# Altium PCB N-GLCD.PcbDoc
Units mm, origin at the board's own origin, x right, y up, seen from the top; angles counter-clockwise.
Board outline 33.02 x 15.24 mm, 2 copper layers (Top Layer, Bottom Layer), stack 1.571 mm thick; 10 components, 17 nets, 70 pads, 14 vias.
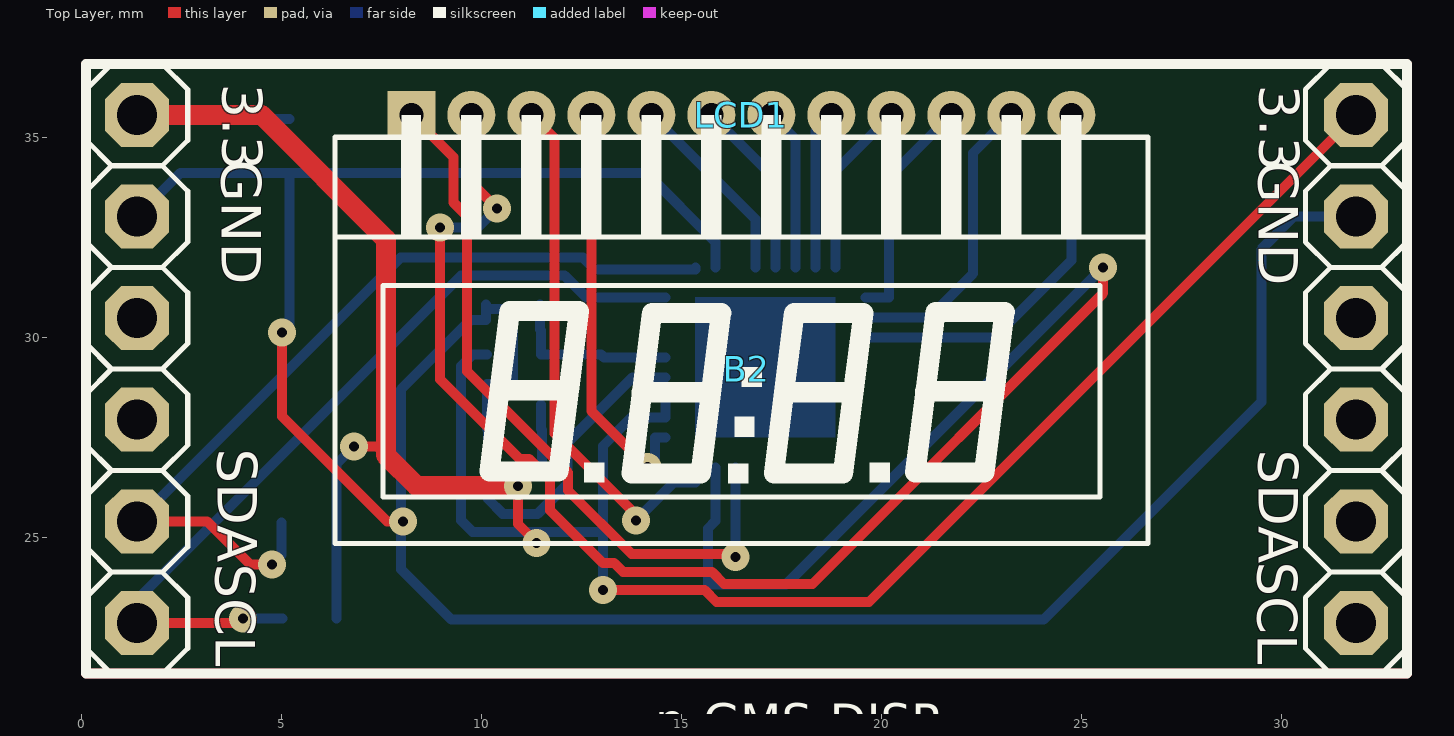
[diagram p0: Top Layer view]
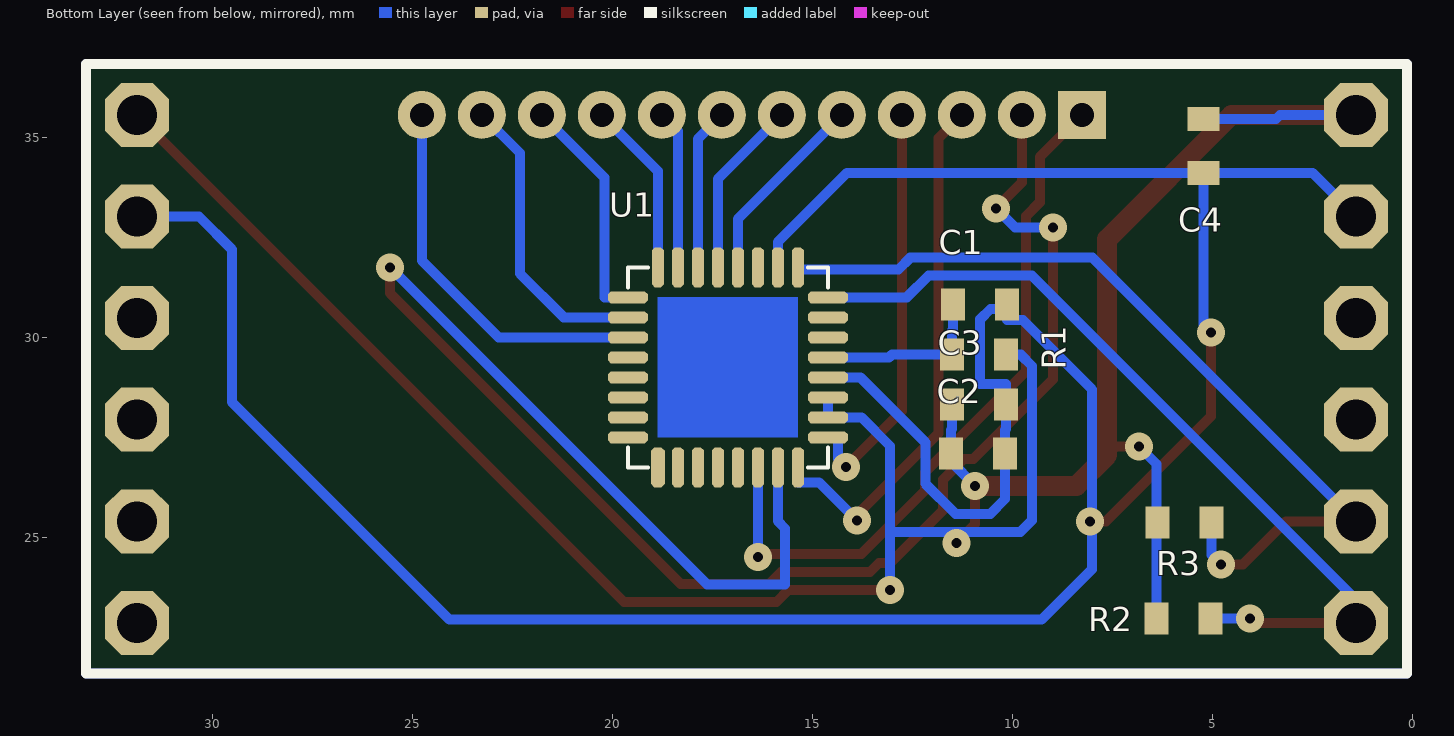
[diagram p1: Bottom Layer view, seen from below]

## Layer stack, top to bottom
Top Solder: solder mask 0.0102, Solder Resist, Dk 3.5
Top Layer: signal copper 0.0356
Dielectric 1: dielectric 1.5, FR-4, Dk 4.8
Bottom Layer: signal copper 0.0356
Bottom Solder: solder mask 0.0102, Solder Resist, Dk 3.5

## Board outline
0.127,21.59 33.147,21.59 33.147,36.83 0.127,36.83

## Design rules (kind name [scope] priority, off if disabled: settings)
Clearance [All] p1: gap=0.2 ignorepadtopadclearanceinfootprint=FALSE except(0: Arc-Hole Track-Hole SMDPad-Hole THPad-Hole Via-Hole Fill-Hole Poly-Hole Region-Hole Text-Hole)
PolygonConnect [All] p1: connectstyle=Relief reliefconductorwidth=0.254 reliefentries=4 polygonreliefangle="90 Angle" airgapwidth=0.254
RoomDefinition N-GLCD [InComponentClass('N-GLCD')] p1: confinementstyle=ConfineIn formatcopy=TRUE lockcomponents=FALSE outline 34.417,44.196 -2.159,44.196 -2.159,-1.397 34.417,-1.397
RoutingVias [All] p1: holewidth=0.25 width=0.7 viastyle="Through Hole" minholewidth=0.25 minwidth=0.7 maxholewidth=0.25 maxwidth=0.7
SolderMaskExpansion [All] p1: expansion=0.102 istentingtop=FALSE
Width [All] p1: maxlimit=1.27 minlimit=0.25 preferedwidth=0.25
30 further rules are at their usual default settings.

## Components (designator, comment, footprint, x,y, rotation, side; value= is the part's Value field where it differs from the comment)
B2 "N-GMS-DISP" N-GMS-DISP 1.397,35.56 r270 top locked
C1 "100nF" 0603_cap 10.81,30.815 r180 bottom
C2 "100nF" 0603_cap 10.835,27.09 r0 bottom
C3 "100nF" 0603_cap 10.835,28.315 r180 bottom
C4 "100nF" 0603_cap 5.207,34.798 r270 bottom
LCD1 "S401M16KR" LCD-S401M16KR 8.255,35.56 r0 top locked
R1 "10K" 0603_res 10.81,29.565 r0 bottom
R2 "10K" 0603_res 5.725,22.975 r180 bottom
R3 "10K" 0603_res 5.7,25.375 r180 bottom
U1 "PCA8561AHN" QFN32-HVQFN32_0.5mm_LONG 14.605,31.75 r0 bottom

## Footprints (in the part's own frame and the unit in brackets; to place one, negate y for a bottom-side part, rotate by r counter-clockwise, add the part's x,y. Pads: shape width x height; smd on the part's side, far side on the other; paste and mask are expansions set on the pad)
0603_cap [mm]
  rect 0.6x0.8 smd: 1(-0.66,0) 2(0.686,0)
  body extent -0.8,-0.4 0.8,0.4, height 0.3
0603_res [mm]
  rect 0.6x0.8 smd: 1(-0.66,0) 2(0.686,0)
  body extent -0.8,-0.4 0.8,0.4, height 0.3
LCD-S401M16KR [mm]
  rect 1.2x1.2 hole 0.6: 1(0,0)
  round 1.2 hole 0.6: 2(1.5,0) 3(3,0) 4(4.5,0) 5(6,0) 6(7.5,0) 7(9,0) 8(10.5,0) 9(12,0) 10(13.5,0) 11(15,0) 12(16.5,0)
  silkscreen extent -1.91,-10.72 18.41,0
N-GMS-DISP [mil]
  oct 63x63 hole 39.37: 1(0,0) 2(100,0) 3(200,0) 4(300,0) 5(400,0) 6(500,0) 7(500,1200) 8(400,1200) 9(300,1200) 10(200,1200) 11(100,1200) 12(0,1200)
  silkscreen extent -50,-50 550,1250, body extent -48,-48 552,1250, height 331
QFN32-HVQFN32_0.5mm_LONG [mm]
  oct 1x0.3 smd: 1(0,4.25) 2(0,3.75) 3(0,3.25) 4(0,2.75) 5(0,2.25) 6(0,1.75) 7(0,1.25) 8(0,0.75) 17(5,0.75) 18(5,1.25) 19(5,1.75) 20(5,2.25) 21(5,2.75) 22(5,3.25) 23(5,3.75) 24(5,4.25)
  oct 0.3x1 smd: 9(0.75,0) 10(1.25,0) 11(1.75,0) 12(2.25,0) 13(2.75,0) 14(3.25,0) 15(3.75,0) 16(4.25,0) 26(3.75,5) 27(3.25,5) 28(2.75,5) 29(2.25,5) 30(1.75,5) 31(1.25,5) 32(0.75,5)
  oct 0.35x1 smd: 25(4.25,5)
  Top Layer region: 0.75,4.25 4.25,4.25 4.25,0.75 0.75,0.75
  silkscreen extent 0,0 5,5, body extent 0,0 5,5, height 0.97

## Part data
C1 C2 C3 C4: library part C, "CAPACITOR"
LCD1: library part LCD-S401M16KR
R1 R2 R3: library part R, "RESISTOR"

## Via types
v1: diameter 0.7, hole 0.25, Top Layer to Bottom Layer, tented both sides, 13 vias
v2: diameter 0.7, hole 0.25, Top Layer to Bottom Layer, 1 vias

## Nets (pads, with @x,y where several pads share a name; then routed paths per layer and width w, separated by ;. In a path a pad name is that pad's centre, name@x,y a point inside that pad or via, vN(x,y) a via of type N, cw(c..) or ccw(c..) an arc to the next point about the centre after c; other vN are vias at no path point)
3.3V: B2.1 B2.12 C2.2 C3.1 C4.1 R1.1 R2.1 R3.1 U1.2 U1.3 | length 68.3
  Top Layer w0.25: v2(6.825,27.275) 7.4,27.275 7.62,27.055 ; v1(10.922,26.289) 10.922,25.331 v1(11.39,24.863) ; v1(13.048,23.681) 15.592,23.681 15.889,23.383 19.7,23.383 B2.12
  Top Layer w0.5: B2.1 4.515,35.56 7.62,32.455 7.62,27.055 8.386,26.289 v1(10.922,26.289)
  Bottom Layer w0.25: B2.1 3.302,35.56 3.404,35.458 C4.1 ; R2.1 6.385,26.835 v2(6.825,27.275) ; R1.1 9.779,29.566 9.5,29.286 9.5,25.425 9.786,25.139 11.115,25.139 ; v1(10.922,26.289) 11.521,26.888 C2.2 11.521,27.686 11.495,27.711 C3.1 ; v1(11.39,24.863) 11.115,25.139 ; v1(13.048,23.681) 13.048,25.139 ; U1.3 U1.2 13.764,28 13.048,27.283 13.048,25.139 ; 11.115,25.139 13.048,25.139
COM0: LCD1.1 U1.30 | length 18.1
  Top Layer w0.25: LCD1.1 9.305,34.51 9.305,33.374 9.65,33.03 9.65,29.152 12.175,26.627 12.175,26.172 13.767,24.581 16.283,24.581 v1(16.355,24.508)
  Bottom Layer w0.25: v1(16.355,24.508) U1.30
COM1: LCD1.2 U1.31 | length 47
  Top Layer w0.25: v1(8.975,32.75) 8.975,28.95 10.961,26.964 11.202,26.964 11.725,26.441 11.725,25.675 13.044,24.356 13.327,24.356 13.552,24.131 15.778,24.131 16.075,23.833 18.283,23.833 25.552,31.102 v1(25.552,31.75) ; LCD1.2 9.755,33.87 v1(10.4,33.225)
  Bottom Layer w0.25: v1(8.975,32.75) 9.925,32.75 v1(10.4,33.225) ; U1.31 15.855,25.405 15.672,25.222 15.672,23.825 17.628,23.825 v1(25.552,31.75)
COM2: LCD1.3 U1.32 | length 13.5
  Top Layer w0.25: LCD1.3 11.836,34.979 11.836,27.602 13.876,25.563 v1(13.876,25.426)
  Bottom Layer w0.25: v1(13.876,25.426) 14.824,26.375 15.355,26.375 U1.32
COM3: LCD1.4 U1.1 | length 10.5
  Top Layer w0.25: LCD1.4 12.755,28.158 v1(14.155,26.758)
  Bottom Layer w0.25: v1(14.155,26.758) 14.351,26.954 14.351,27.5 U1.1
GND: B2.2 B2.11 C1.2 C2.1 C3.2 C4.2 U1.4 U1.10 | length 77.7
  Top Layer w0.25: v1(5.025,30.125) 5.025,28.025 7.65,25.4 v1(8.05,25.4)
  Bottom Layer w0.25: B2.2 2.489,34.112 C4.2 ; v1(5.025,30.125) 5.207,30.307 C4.2 ; v1(8.05,25.4) v1@8,25.4 ; C1.2 C1.2@10.124,30.709 ; U1.4 13.792,29 12.167,27.374 12.167,26.34 11.416,25.589 10.541,25.589 10.175,25.955 C2.1 10.175,27.686 10.149,27.711 C3.2 10.149,28.829 10.795,28.829 10.795,30.455 10.541,30.709 C1.2@10.124,30.709 ; U1.10 15.855,32.385 14.128,34.112 C4.2 ; B2.11 30.325,33.02 29.505,32.2 29.505,28.38 24.065,22.94 9.26,22.94 8,24.2 v1@8,25.4 ; v1@8,25.4 8,28.701 9.728,30.429 10.124,30.429 C1.2@10.124,30.709
RESET: C1.1 R1.2 U1.5 | length 4.4
  Bottom Layer w0.25: C1.1 11.47,30.201 11.496,30.175 R1.2 13.005,29.565 13.07,29.5 U1.5
S0: LCD1.5 U1.12 | length 4.9
  Bottom Layer w0.25: LCD1.5 16.855,32.96 U1.12
S1: LCD1.6 U1.13 | length 4.5
  Bottom Layer w0.25: LCD1.6 17.355,33.96 U1.13
S2: LCD1.7 U1.14 | length 4.1
  Bottom Layer w0.25: LCD1.7 17.855,34.96 U1.14
S3: LCD1.8 U1.15 | length 4
  Bottom Layer w0.25: U1.15 18.355,35.16 LCD1.8
S4: LCD1.9 U1.16 | length 4.4
  Bottom Layer w0.25: U1.16 18.855,34.16 LCD1.9
S5: LCD1.10 U1.17 | length 5.8
  Bottom Layer w0.25: U1.17 20.193,31 20.193,33.998 LCD1.10
S6: LCD1.11 U1.18 | length 7.5
  Bottom Layer w0.25: U1.18 21.209,30.5 22.301,31.592 22.301,34.606 LCD1.11
S7: LCD1.12 U1.19 | length 9.6
  Bottom Layer w0.25: U1.19 22.837,30 24.755,31.918 LCD1.12
SCL: B2.6 R2.2 U1.8 | length 21.1
  Top Layer w0.25: B2.6 3.935,22.86 v1(4.05,22.975)
  Bottom Layer w0.25: B2.6 1.397,23.437 9.5,31.54 12.09,31.54 12.631,31 U1.8 ; v1(4.05,22.975) R2.2
SDA: B2.5 R3.2 U1.9 | length 21.8
  Top Layer w0.25: B2.5 3.15,25.4 4.225,24.325 v1(4.775,24.325)
  Bottom Layer w0.25: B2.5 7.987,31.99 12.545,31.99 12.836,31.699 15.355,31.699 U1.9 ; v1(4.775,24.325) 5.014,24.564 R3.2
pads on no net: B2.3 B2.4 B2.7 B2.8 B2.9 B2.10 U1.6 U1.7 U1.11 U1.20 U1.21 U1.22 U1.23 U1.24 U1.25 U1.26 U1.27 U1.28 U1.29
copper on no net: | length 193
  Top Layer w0.25: 0.127,21.59 33.147,21.59 33.147,36.83 0.127,36.83 0.127,21.59
  Bottom Layer w0.25: 0.127,21.59 33.147,21.59 33.147,36.83 0.127,36.83 0.127,21.59

## Silkscreen, mask and mechanical layers (free items; w line width, h text height)
Top Overlay:
  the board outline again, w0.25
Bottom Overlay:
  the board outline again, w0.25
Mechanical 3:
  the board outline again, w0.2

## Text inside footprints (layer, text, board x,y; h text height)
B2: Top Overlay "n-GMS-DISP" at 14.35,19.675 h1.5; Top Overlay "3.3" at 29.147,36.315 h1.7 r270; Top Overlay "GND" at 29.122,34.415 h1.7 r270; Top Overlay "SDA" at 29.122,27.19 h1.7 r270; Top Overlay "SCL" at 29.097,24.39 h1.7 r270; Top Overlay "SCL" at 3.047,24.34 h1.7 r270; Top Overlay "SDA" at 3.097,27.215 h1.7 r270; Top Overlay "GND" at 3.197,34.44 h1.7 r270; Top Overlay "3.3" at 3.222,36.34 h1.7 r270